# Altium PCB USBC Isolator.PcbDoc
Units mm, origin at the board's own origin, x right, y up, seen from the top; angles counter-clockwise.
Board outline 60 x 39 mm, 4 copper layers (Top Layer, Layer 1, Layer 2, Bottom Layer), stack 1.592 mm thick; 30 components, 18 nets, 132 pads, 60 vias.
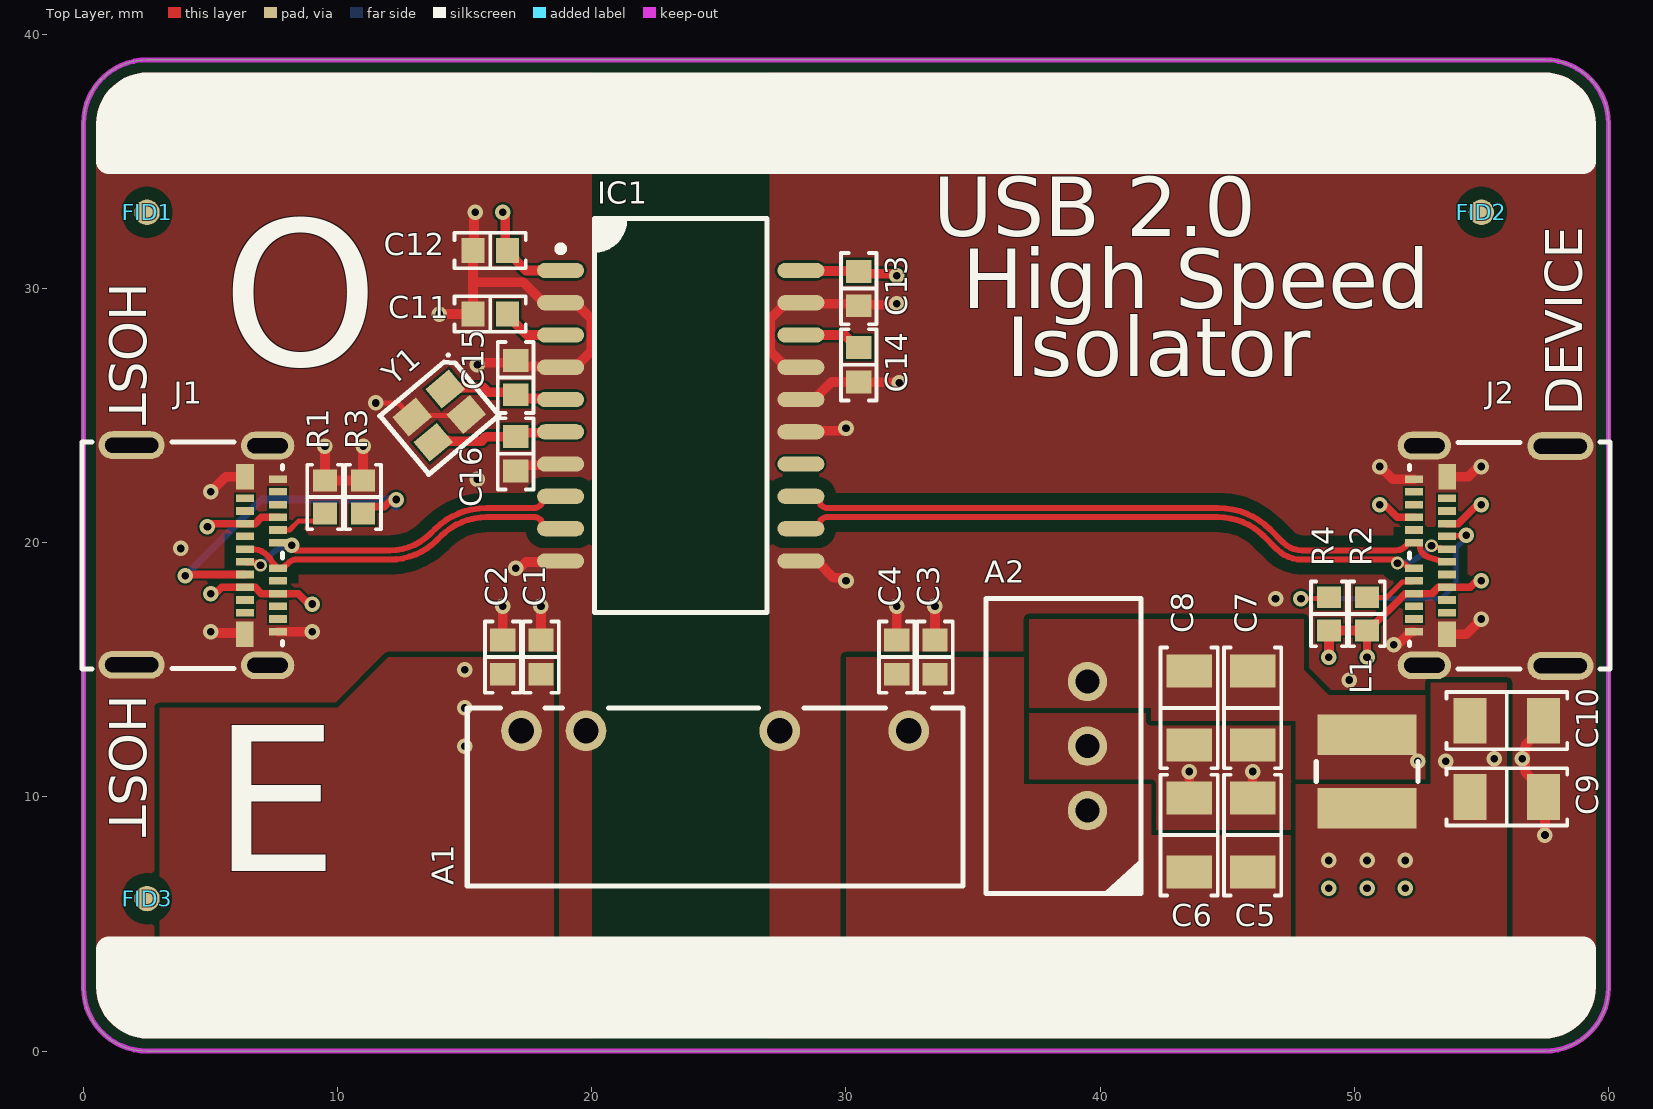
[diagram p0: Top Layer view]
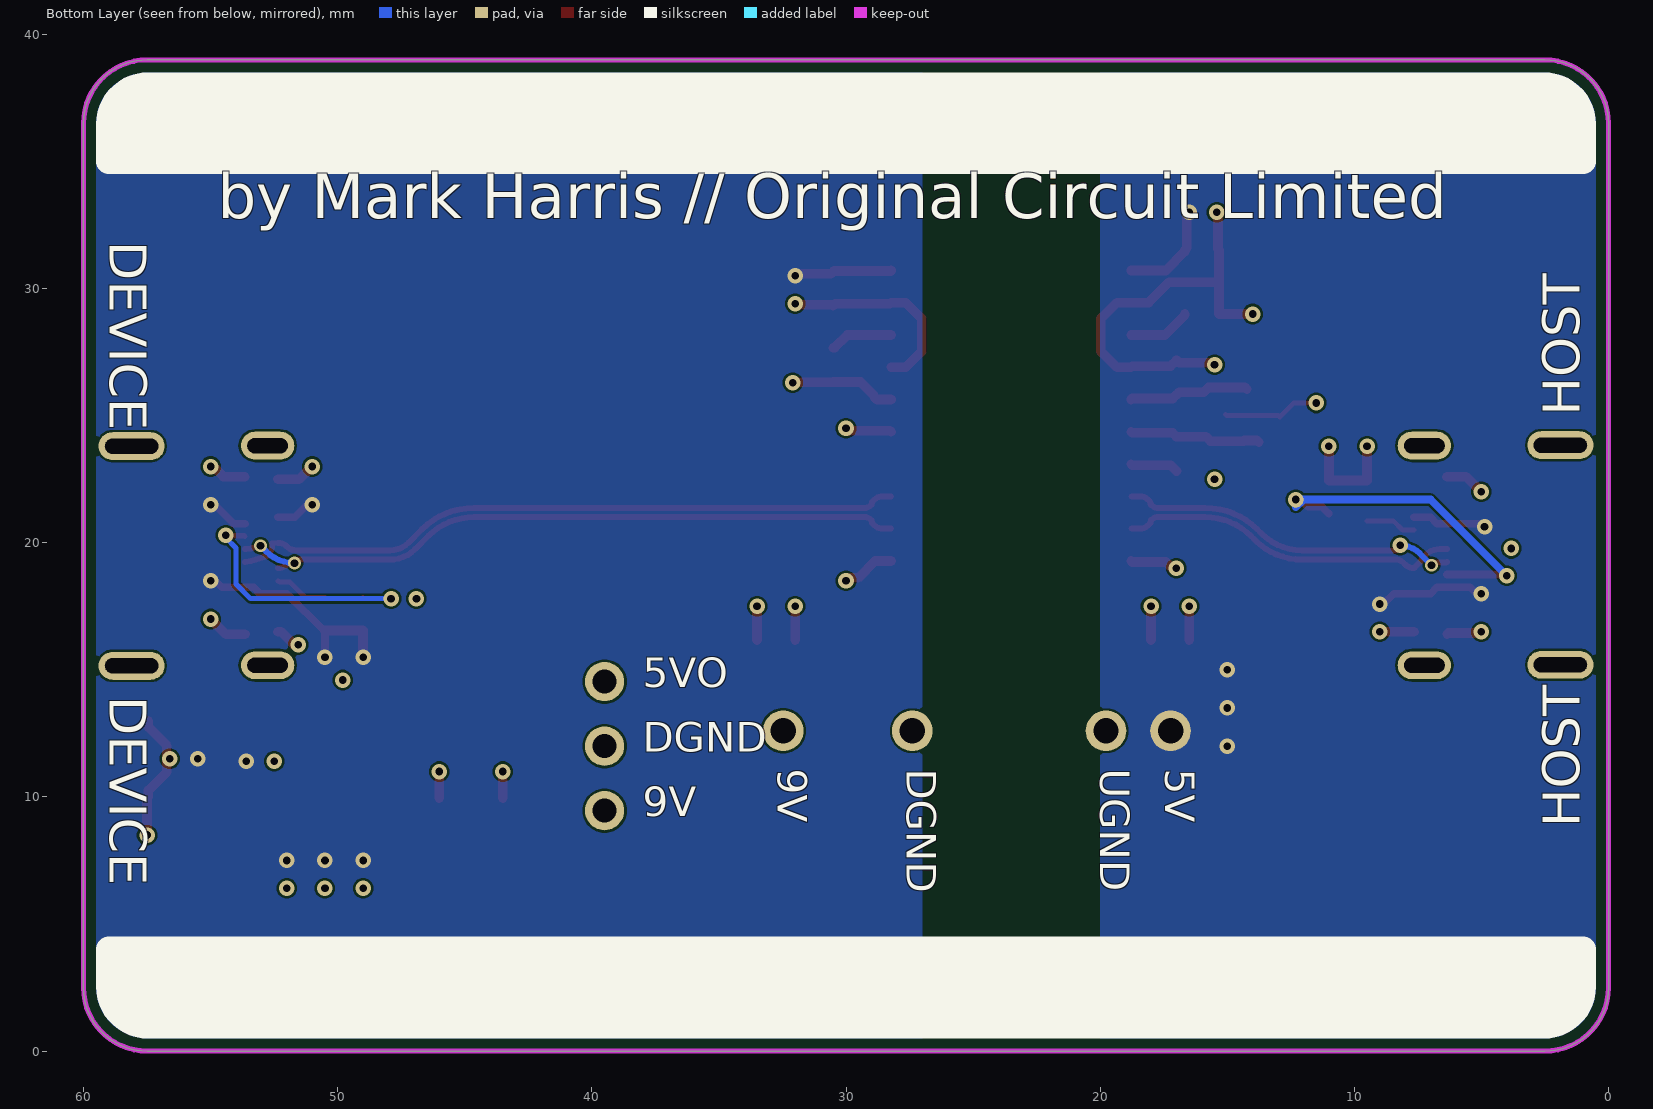
[diagram p1: Bottom Layer view, seen from below]
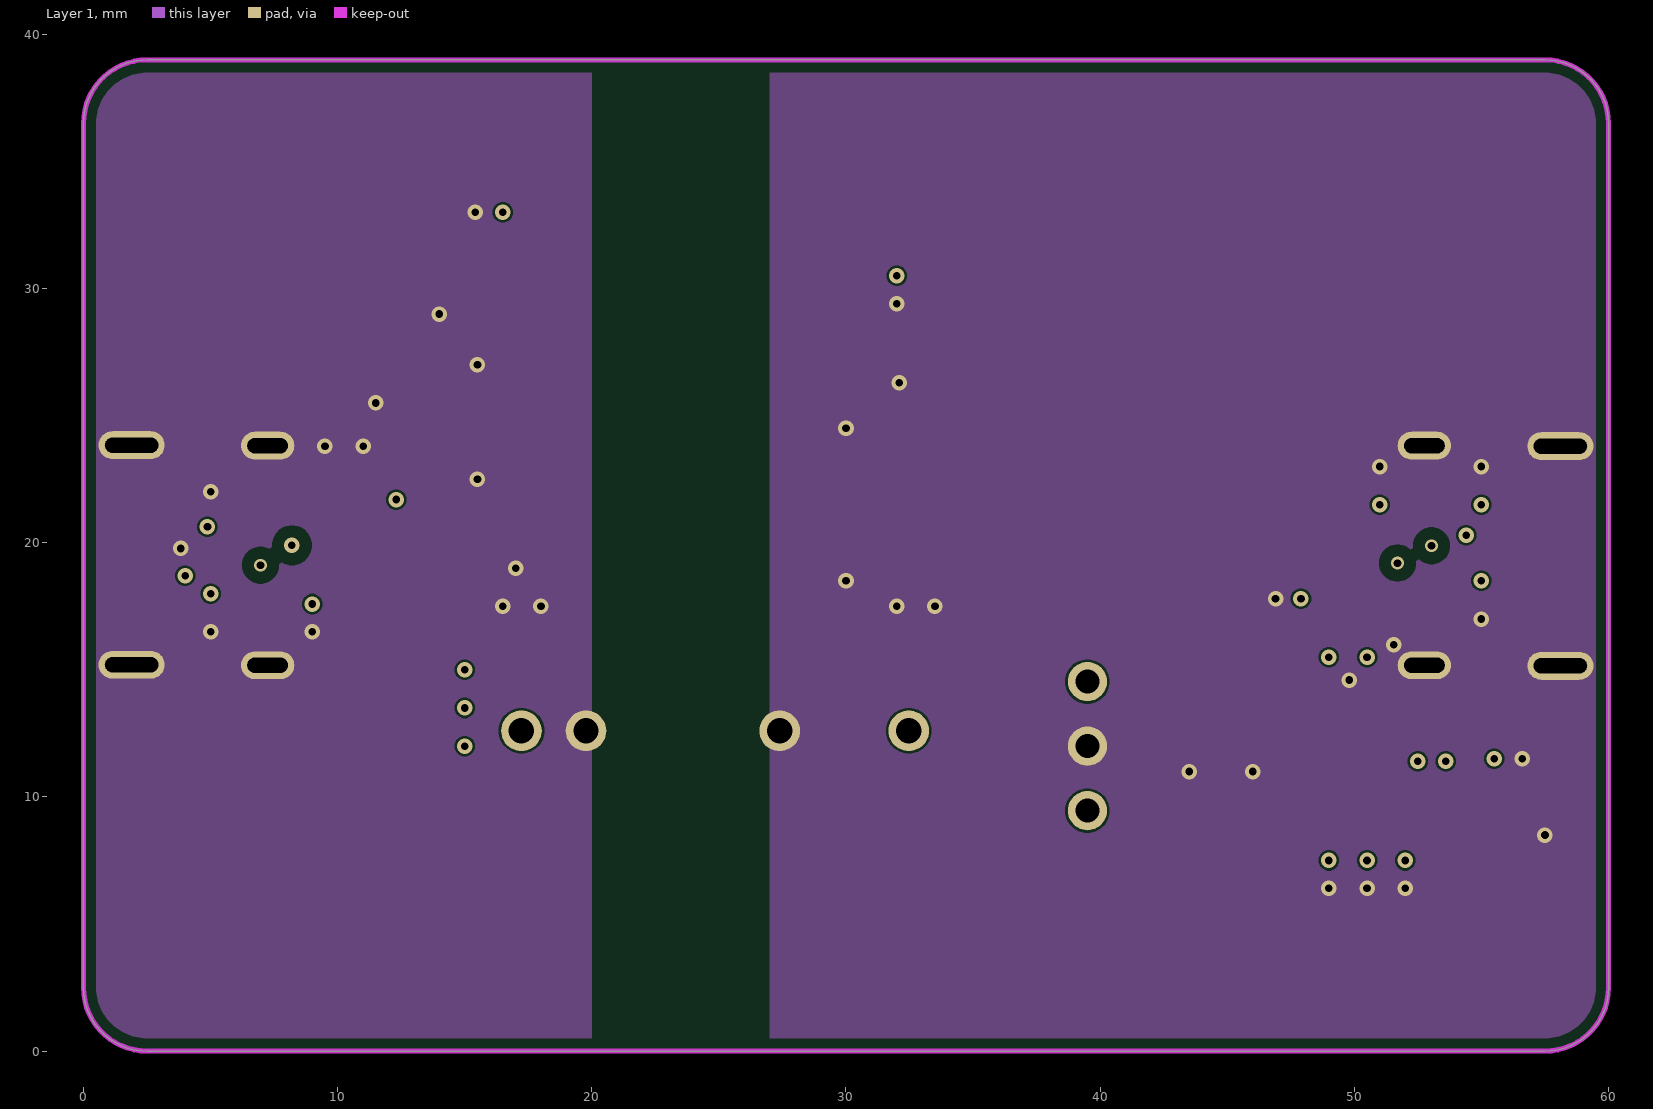
[diagram p2: Layer 1]
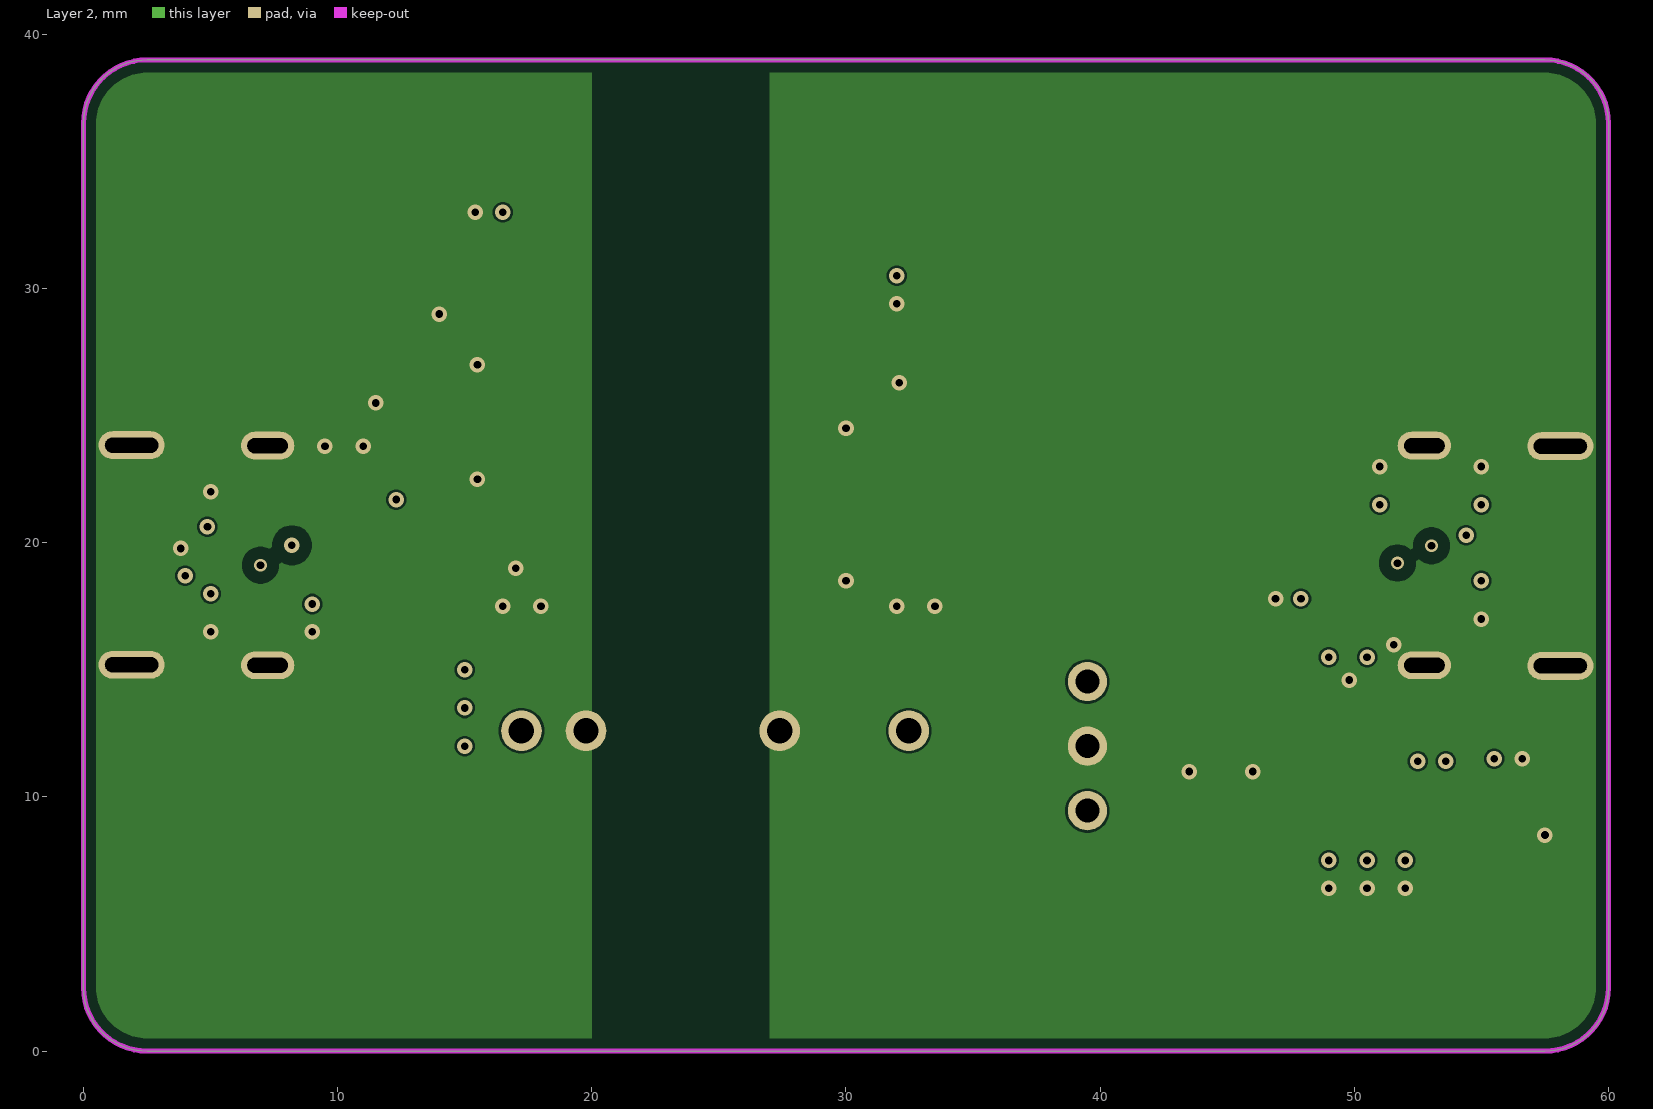
[diagram p3: Layer 2]
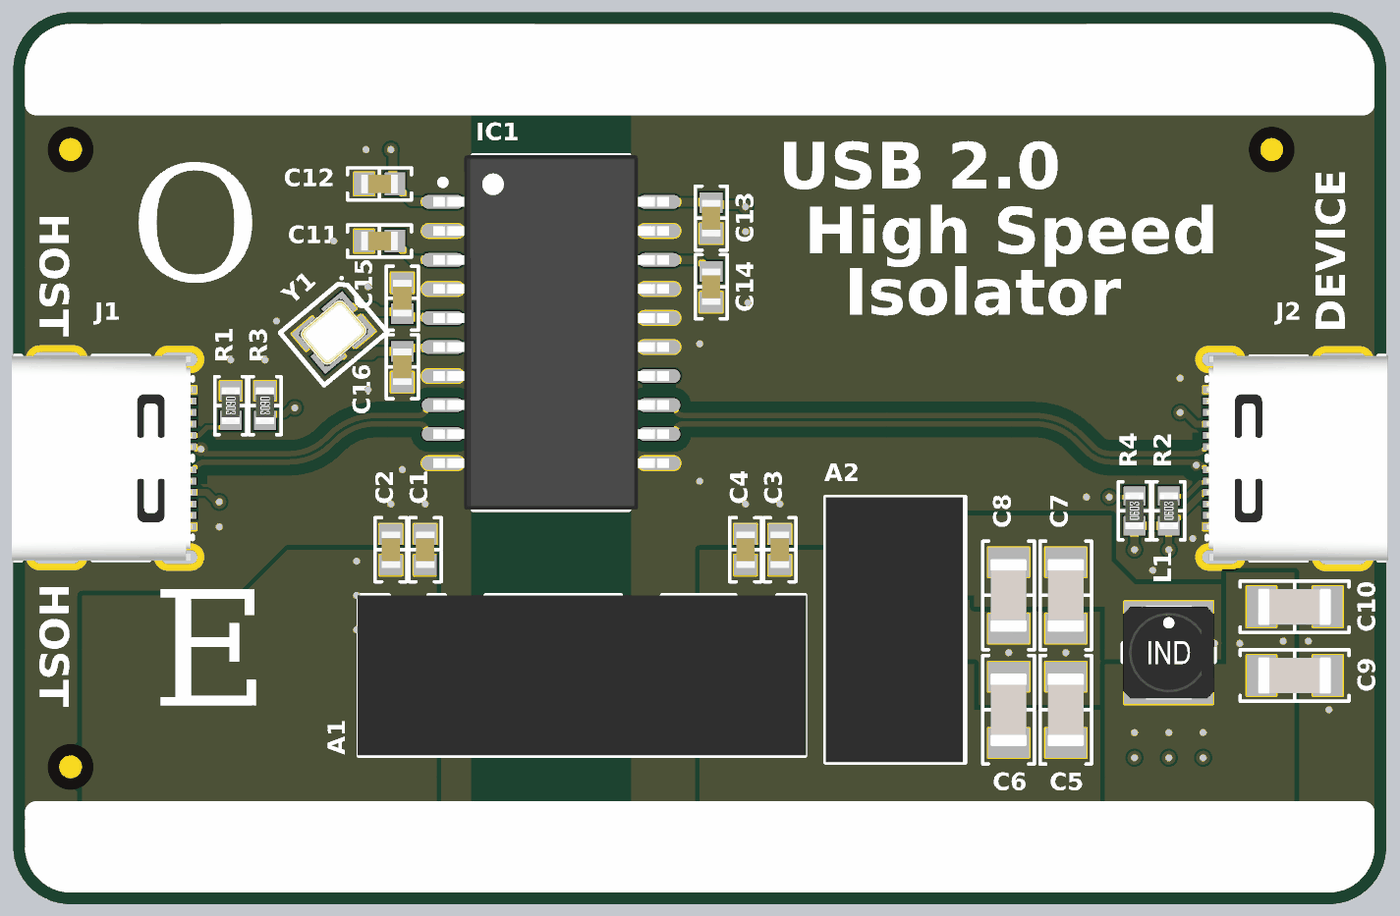
[diagram p4: 3D render of the assembled board from above, using the file's embedded part models]

## Layer stack, top to bottom
Top Solder: solder mask 0.0102, Solder Resist, Dk 3.8
Top Layer: signal copper 0.0356
Dielectric 2: prepreg 0.2104, PP-006, Dk 4.4
Layer 1: signal copper 0.0175
Dielectric 1: dielectric 1.065, FR-4, Dk 4.6
Layer 2: signal copper 0.0175
Dielectric 3: prepreg 0.2104, PP-006, Dk 4.4
Bottom Layer: signal copper 0.0356
Bottom Solder: solder mask 0.0102, Solder Resist, Dk 3.8

## Board outline
2.5,0 cw(c2.5,2.5) 0,2.5 0,36.5 cw(c2.5,36.5) 2.5,39 57.5,39 cw(c57.5,36.5) 60,36.5 60,2.5 cw(c57.5,2.5) 57.5,0

## Design rules (kind name [scope] priority, off if disabled: settings)
BoardOutlineClearance [All] p1: gap=0.5 ignorepadtopadclearanceinfootprint=FALSE
Clearance Clearance_Poly [InPolygon vs InPolygon] p1: gap=0.2 ignorepadtopadclearanceinfootprint=FALSE
Clearance Clearance_USB [InDifferentialPairClass('USB') vs InNet('DGND') OR InNet('UGND')] p2: gap=0.472 ignorepadtopadclearanceinfootprint=FALSE
Clearance [All] p3: gap=0.09 ignorepadtopadclearanceinfootprint=FALSE except(0.2: Arc-THPad Track-THPad SMDPad-THPad; 0.5: THPad-THPad)
ComponentClearance ComponentClearance_VREG [(HasFootprint('GAPTEC 3S7B_3U SINGLE') OR HasFootprint('GAPTEC LCB78_0.5'))] p1: gap=0.5 collisioncheckmode=3 verticalgap=-3 showdistances=TRUE
ComponentClearance [All] p2: gap=0.254 collisioncheckmode=3 verticalgap=0.254 showdistances=TRUE
DiffPairsRouting [InDifferentialPairClass('USB')] p1: maxlimit=0.127 minlimit=0.125 mostfreqgap=0.127 toplayer_maxgap=0.125 toplayer_prefgap=0.125 toplayer_minwidth=0.236 toplayer_maxwidth=0.236 toplayer_prefwidth=0.236 midlayer1_mingap=0.127 midlayer1_minwidth=0.148 midlayer1_maxwidth=0.148 midlayer1_prefwidth=0.148 midlayer2_mingap=0.127 midlayer2_minwidth=0.148 midlayer2_maxwidth=0.148 midlayer2_prefwidth=0.148 bottomlayer_maxgap=0.125 bottomlayer_prefgap=0.125 bottomlayer_minwidth=0.236 bottomlayer_maxwidth=0.236 bottomlayer_prefwidth=0.236 impedanceprofiledriven=TRUE impedanceprofileid={089979F6-FE9B-4256-AC42-D2907E0BB9E0} impedanceprofilevalue=90.000000 maxuncoupledlength=10
MinimumSolderMaskSliver [All] p1: minsoldermaskwidth=0.1
PlaneClearance [All] p1: clearance=0.2
PolygonConnect [All] p1: connectstyle=Direct reliefconductorwidth=0.254 reliefentries=4 polygonreliefangle="90 Angle" airgapwidth=0.254
RoutingVias [All] p1: holewidth=0.3 width=0.6 viastyle="Through Hole" minholewidth=0.15 minwidth=0.45 maxholewidth=6.3 maxwidth=6.6
SilkToSilkClearance [All] p1: silktosilkclearance=-3
SilkToSolderMaskClearance [IsPad] p1: minsilkscreentomaskgap=-3 clearancetoexposedcopper=TRUE
SolderMaskExpansion SolderMaskExpansion_Via [IsVia] p1: expansion=0.102 istentingtop=TRUE
SolderMaskExpansion [All] p2: expansion=0.05 istentingtop=FALSE
Width [All] p1: maxlimit=3 minlimit=0.09 preferedwidth=0.2
24 further rules are at their usual default settings.

## Classes and differential pairs
differential pair class USB: IN_USB OUT_USB
differential pair OUT_USB: +OUT_USB_DP -OUT_USB_DN
differential pair IN_USB: +IN_USB_DP -IN_USB_DN

## Components (designator, comment, footprint, x,y, rotation, side; value= is the part's Value field where it differs from the comment)
A1 "3S7B_0509S3U" "GAPTEC 3S7B_3U SINGLE" 25,10 r0 top
A2 "LCB78_05-0.5" "GAPTEC LCB78_0.5" 38.5,12 r90 top
C1 "1 µF" "CAP 0603_1608" 18,15.5 r270 top
C2 "0.1 µF" "CAP 0603_1608" 16.5,15.5 r270 top
C3 "0.1 µF" "CAP 0603_1608" 33.5,15.5 r270 top
C4 "1 µF" "CAP 0603_1608" 32,15.5 r270 top
C5 "10 µF" "CAP 1206_3216 - 0.8MM" 46,8.5 r270 top
C6 "10 µF" "CAP 1206_3216 - 0.8MM" 43.5,8.5 r270 top
C7 "10 µF" "CAP 1206_3216 - 0.8MM" 46,13.5 r90 top
C8 "10 µF" "CAP 1206_3216 - 0.8MM" 43.5,13.5 r90 top
C9 "10 µF" "CAP 1206_3216 - 0.8MM" 56,10 r180 top
C10 "10 µF" "CAP 1206_3216 - 0.8MM" 56,13 r180 top
C11 "0.1 µF" "CAP 0603_1608" 16,29 r0 top
C12 "0.1 µF" "CAP 0603_1608" 16,31.5 r0 top
C13 "0.1 µF" "CAP 0603_1608" 30.5,30 r90 top
C14 "0.1 µF" "CAP 0603_1608" 30.5,27 r90 top
C15 "8 pF" "CAP 0603_1608" 17,26.5 r270 top
C16 "8 pF" "CAP 0603_1608" 17,23.5 r90 top
FID1 "Fiducial" Fiducial-1mm 2.5,33 r90 top
FID2 "Fiducial" Fiducial-1mm 55,33 r90 top
FID3 "Fiducial" Fiducial-1mm 2.5,6 r90 top
IC1 "ADUM4165BRIZ" "ANALOG SOIC-20 RI-20-1" 23.5,25 r0 top
J1 "1054500101" "Molex 1054500101" 7,19.5 r270 top
J2 "1054500101" "Molex 1054500101" 53,19.5 r90 top
L1 "22 µH" "TDK VLCF4028-2" 50.5,11 r270 top
R1 "5.1 kOhms" "RES 0603_1608" 9.5,21.8 r270 top
R2 "22 kOhms" "RES 0603_1608" 50.5,17.2 r90 top
R3 "5.1 kOhms" "RES 0603_1608" 11,21.8 r270 top
R4 "22 kOhms" "RES 0603_1608" 49,17.2 r90 top
Y1 "24 MHz" "NDK NX2520SA" 14,25 r220 top

## Footprints (in the part's own frame and the unit in brackets; to place one, negate y for a bottom-side part, rotate by r counter-clockwise, add the part's x,y. Pads: shape width x height; smd on the part's side, far side on the other; paste and mask are expansions set on the pad)
"ANALOG SOIC-20 RI-20-1" [mm] "SOIC, 20-Leads, Body 15.41x7.49mm, Pitch 1.27mm, IPC Medium Density"
  oval 1.85x0.6 smd: 1(-4.725,5.715) 2(-4.725,4.445) 3(-4.725,3.175) 4(-4.725,1.905) 5(-4.725,0.635) 6(-4.725,-0.635) 7(-4.725,-1.905) 8(-4.725,-3.175) 9(-4.725,-4.445) 10(-4.725,-5.715) 11(4.725,-5.715) 12(4.725,-4.445) 13(4.725,-3.175) 14(4.725,-1.905) 15(4.725,-0.635) 16(4.725,0.635) 17(4.725,1.905) 18(4.725,3.175) 19(4.725,4.445) 20(4.725,5.715)
  silkscreen extent -4.85,-7.75 3.4,7.75, body extent -5.15,-7.75 5.15,7.75, height 2.64
"CAP 0603_1608" [mm] "Chip Capacitor, 2-Leads, Body 1.60x0.80mm, IPC Medium Density"
  rect 0.9x1 smd: 1(-0.675,0) 2(0.675,0)
  silkscreen extent -1.4,-0.7 1.4,0.7, body extent -0.8,-0.41 0.8,0.41, height 0.82
"CAP 1206_3216 - 0.8MM" [mm] "Chip Capacitor, 2-Leads, Body 3.25x1.60mm, IPC Medium Density"
  rect 1.3x1.8 smd: 1(-1.45,0) 2(1.45,0)
  silkscreen extent -2.37,-1.12 2.37,1.12, body extent -1.6,-0.8 1.6,0.8, height 0.8
Fiducial-1mm [mm]
  round 1 smd paste-1 mask+0.5: F(0,0)
  Top Layer pour cut-out: -1,0 -0.924,0.383 -0.707,0.707 -0.383,0.924 0,1 0,1 0.383,0.924 0.707,0.707 0.924,0.383 1,0 1,0 0.924,-0.383 0.707,-0.707 0.383,-0.924 0,-1 0,-1 -0.383,-0.924 -0.707,-0.707 -0.924,-0.383 -1,0
"GAPTEC 3S7B_3U SINGLE" [mm] "3W Single/Dual Output - Fixed Input - Isolated & Semi-regulated"
  round 1.6 hole 1: 1(-7.77,2.6) 2(-5.23,2.6) 5(2.39,2.6) 7(7.47,2.6)
  silkscreen extent -9.9,-3.5 9.6,3.5, body extent -9.95,-3.5 9.65,3.5, height 10
"GAPTEC LCB78_0.5" [mm] "Wide Input Non-Isolated & Regulated, Single Output"
  round 1.55 hole 0.95: 1(-2.54,-1) 2(0,-1) 3(2.54,-1)
  silkscreen extent -5.8,-3.1 5.8,3, body extent -5.8,-3 5.8,3, height 10.2
"Molex 1054500101" [mm] "USB-C Receptacle Connector 24 Position Surface Mount, 24 Position, Body 8.94x7.90mm"
  rect 0.3x0.7 smd: A1(-3,0.655) A2(-2.5,0.655) A3(-2,0.655) A4(-1.5,0.655) A5(-1,0.655) A6(-0.5,0.655) A7(0.5,0.655) A8(1,0.655) A9(1.5,0.655) A10(2,0.655) A11(2.5,0.655) A12(3,0.655) B2(2.25,-0.645) B3(1.75,-0.645) B4(1.25,-0.645) B5(0.75,-0.645) B6(0.25,-0.645) B7(-0.25,-0.645) B8(-0.75,-0.645) B9(-1.25,-0.645) B10(-1.75,-0.645) B11(-2.25,-0.645)
  rect 1x0.7 smd: B1(3.1,-0.655) B12(-3.1,-0.645)
  oval 1.1x2.6 hole 2.1 slot 0.6 at 0 deg unplated: S(-4.34,-5.105) S(4.3,-5.105)
  oval 1.1x2.1 hole 1.6 slot 0.6 at 0 deg unplated: S(-4.32,0.245) S(4.32,0.245)
  silkscreen extent -4.47,-7.07 4.47,0.83, body extent -4.47,-7.07 4.47,0.83, height 3.21
"NDK NX2520SA" [mm] "Crystal, 4-Leads, Body 2.00x2.50mm, Pitch 1.70mm, IPC Medium Density"
  rect 1.2x1 smd: 1(-0.85,-0.65) 2(0.85,-0.65) 3(0.85,0.65) 4(-0.85,0.65)
  silkscreen extent -1.85,-1.65 1.8,1.5, body extent -1.26,-1.01 1.26,1.01, height 0.5
"RES 0603_1608" [mm] "Chip Resistor, 2-Leads, Body 1.60x0.80mm, IPC Medium Density"
  rect 0.85x0.95 smd: 1(-0.65,0) 2(0.65,0)
  silkscreen extent -1.27,-0.7 1.27,0.7, body extent -0.8,-0.4 0.8,0.4, height 0.45
"TDK VLCF4028-2" [mm] "Precision Wire Wound Inductor, 2-Leads, Body 4.00x4.00mm, IPC Medium Density"
  rect 1.6x3.9 smd: 1(-1.45,0) 2(1.45,0)
  silkscreen extent -0.4,-2 0.4,2, body extent -2.05,-2 2.05,2, height 2.81

## Part data
A1: "DC-DC", Current - Output (Max)=333mA, Manufacturer="GAPTEC Electronic", Operating Temperature="-40°C ~ 85°C", Power (Watts)="3 W", Supplier Part Number 1=3182-3S7B_0509S3U-ND, Voltage - Input (Max)=5.5V, Voltage - Input (Min)=4.5V, Voltage - Isolation="3 kV", Voltage - Output 1=9V, Applications="ITE (Commercial)", ComponentLink1Description=Datasheet, ComponentLink1URL=https://gaptec-electronic.com/datenblaetter/3S7B_3U.pdf, ComponentLink2Description="DigiKey Link", ComponentLink2URL=https://www.digikey.com/en/products/detail/gaptec-electronic/3S7B-0509S3U/13692545, Efficiency=84%, LastUpdated="01/09/2023 20:51:51", Lifecycle Status=Active, Minimum Order=1, Mounting Type="Through Hole", Number of Outputs=1, Packaging=Tube, Part Number=3S7B_0509S3U, Part Status=Active, PartId=72, Price=5.05, Series="3S7B_3U (3W)", Size / Dimension="0.77\" L x 0.28\" W x 0.39\" H (19.6mm x 7.0mm x 10.0mm)", Supplier 1=DigiKey, Type="Isolated Module"
A2: "DC-DC POL", Current - Output (Max)=500mA, Manufacturer="GAPTEC Electronic", Operating Temperature="-40°C ~ 85°C (With Derating)", Power (Watts)="2.5 W", Supplier Part Number 1=3182-LCB78_05-0.5-ND, Voltage - Input (Max)=55V, Voltage - Input (Min)=6.5V, Voltage - Output 1=5V, Applications="ITE (Commercial)", ComponentLink1Description=Datasheet, ComponentLink1URL=https://gaptec-electronic.com/datenblaetter/LCB78_0.5.pdf, ComponentLink2Description="DigiKey Link", ComponentLink2URL=https://www.digikey.com/en/products/detail/gaptec-electronic/LCB78-05-0-5/13691990, Efficiency=95%, LastUpdated="04/09/2023 17:37:46", Lifecycle Status=Active, Minimum Order=1, Mounting Type="Through Hole", Number of Outputs=1, Packaging=Tube, Part Number=LCB78_05-0.5, Part Status=Active, PartId=87, Price=5.66, Series=LCB78_0.5, Size / Dimension="0.46\" L x 0.24\" W x 0.40\" H (11.6mm x 6.0mm x 10.2mm)", Supplier 1=DigiKey, Type="Non-Isolated PoL Module"
C1 C4: library part GCM188R71E105KA64D, "CAP CER 1UF 25V X7R 0603", Device Package="0603 (1608 Metric)", Manufacturer="Murata Electronics", Operating Temperature="-55°C ~ 125°C", Ratings=AEC-Q200, Supplier Part Number 1=490-10673-1-ND, Temperature Coefficient=X7R, Tolerance=±10%, Voltage - Rated=25V, Applications=Automotive, Capacitance="1 µF", ComponentLink1Description=Datasheet, ComponentLink1URL=https://www.murata.com/~/media/webrenewal/support/library/catalog/products/capacitor/mlcc/c03e.ashx?la=en-us, ComponentLink2Description="DigiKey Link", ComponentLink2URL=https://www.digikey.com/en/products/detail/murata-electronics/GCM188R71E105KA64D/4903956, LastUpdated="20/08/2023 19:09:04", Lifecycle Status=Active, Minimum Order=1, Mounting Type="Surface Mount, MLCC", Package / Case="0603 (1608 Metric)", Packaging=TapeAndReel, Part Number=GCM188R71E105KA64D, Part Status=Active, PartId=6762, Price=0.03, Series=GCM, Size / Dimension="0.063\" L x 0.031\" W (1.60mm x 0.80mm)", Supplier 1=DigiKey, Thickness (Max)="0.035\" (0.90mm)"
C2 C3 C11 C12 C13 C14: library part CL10B104KB8NNNC, "CAP CER 0.1UF 50V X7R 0603", Device Package="0603 (1608 Metric)", Manufacturer="Samsung Electro-Mechanics", Operating Temperature="-55°C ~ 125°C", Supplier Part Number 1=1276-1000-1-ND, Temperature Coefficient=X7R, Tolerance=±10%, Voltage - Rated=50V, Applications="General Purpose", Capacitance="0.1 µF", ComponentLink1Description=Datasheet, ComponentLink1URL=http://www.samsungsem.com/kr/support/product-search/mlcc/CL10B104KB8NNNC.jsp, ComponentLink2Description="DigiKey Link", ComponentLink2URL=https://www.digikey.com/en/products/detail/samsung-electro-mechanics/CL10B104KB8NNNC/3886658, LastUpdated="20/08/2023 19:09:00", Lifecycle Status=Active, Minimum Order=1, Mounting Type="Surface Mount, MLCC", Package / Case="0603 (1608 Metric)", Packaging=TapeAndReel, Part Number=CL10B104KB8NNNC, Part Status=Active, PartId=9788, Price=0.01, Series=CL, Size / Dimension="0.063\" L x 0.031\" W (1.60mm x 0.80mm)", Supplier 1=DigiKey, Thickness (Max)="0.035\" (0.90mm)"
C5 C6 C7 C8 C9 C10: library part CL31B106KAHNNNE, "CAP CER 10UF 25V X7R 1206", Device Package="1206 (3216 Metric)", Manufacturer="Samsung Electro-Mechanics", Operating Temperature="-55°C ~ 125°C", Supplier Part Number 1=1276-1804-1-ND, Temperature Coefficient=X7R, Tolerance=±10%, Voltage - Rated=25V, Applications="General Purpose", Capacitance="10 µF", ComponentLink1Description=Datasheet, ComponentLink1URL=http://www.samsungsem.com/kr/support/product-search/mlcc/CL31B106KAHNNNE.jsp, ComponentLink2Description="DigiKey Link", ComponentLink2URL=https://www.digikey.com/en/products/detail/samsung-electro-mechanics/CL31B106KAHNNNE/3887462, LastUpdated="03/09/2023 19:14:37", Lifecycle Status=Active, Minimum Order=1, Mounting Type="Surface Mount, MLCC", Package / Case="1206 (3216 Metric)", Packaging=TapeAndReel, Part Number=CL31B106KAHNNNE, Part Status=Active, PartId=40754, Price=0.03, Series=CL, Size / Dimension="0.126\" L x 0.063\" W (3.20mm x 1.60mm)", Supplier 1=DigiKey, Thickness (Max)="0.071\" (1.80mm)"
C15 C16: library part CGA3E2C0G1H080D080AA, "CAP CER 8PF 50V C0G 0603", Device Package="0603 (1608 Metric)", Manufacturer="TDK Corporation", Operating Temperature="-55°C ~ 125°C", Ratings=AEC-Q200, Supplier Part Number 1=445-5626-1-ND, Temperature Coefficient="C0G, NP0", Tolerance=±0.5pF, Voltage - Rated=50V, Applications=Automotive, Capacitance="8 pF", ComponentLink1Description=Datasheet, ComponentLink1URL=https://product.tdk.com/info/en/catalog/datasheets/mlcc_automotive_general_en.pdf?ref_disty=digikey, ComponentLink2Description="DigiKey Link", ComponentLink2URL=https://www.digikey.com/en/products/detail/tdk-corporation/CGA3E2C0G1H080D080AA/2443104, LastUpdated="02/09/2023 19:08:31", Lifecycle Status=Active, Minimum Order=1, Mounting Type="Surface Mount, MLCC", Package / Case="0603 (1608 Metric)", Packaging=TapeAndReel, Part Number=CGA3E2C0G1H080D080AA, Part Status=Active, PartId=15270, Price=0.02, Series=CGA, Size / Dimension="0.063\" L x 0.031\" W (1.60mm x 0.80mm)", Supplier 1=DigiKey, Thickness (Max)="0.035\" (0.90mm)"
IC1: "5KV 480MBPS USB DIG ISOLATOR HOS", Isolated Power=Yes, Manufacturer="Analog Devices Inc.", Operating Temperature="-55°C ~ 125°C", Supplier Device Package=20-SOIC-IC, Supplier Part Number 1=505-ADUM4165BRIZ-ND, Voltage - Isolation=5700Vrms, Voltage - Supply="3V ~ 3.6V, 3V ~ 5.5V", Channel Type=Unidirectional, Common Mode Transient Immunity (Min)=40kV/µs, ComponentLink1Description=Datasheet, ComponentLink1URL=https://www.analog.com/media/en/technical-documentation/data-sheets/adum4165-4166.pdf, ComponentLink2Description="DigiKey Link", ComponentLink2URL=https://www.digikey.com/en/products/detail/analog-devices-inc/ADUM4165BRIZ/16285968, Data Rate=480Mbps, Inputs - Side 1/Side 2=1/0, LastUpdated="01/09/2023 12:37:38", Lifecycle Status=Active, Minimum Order=1, Mounting Type="Surface Mount", Number of Channels=1, Packaging=Tube, Part Number=ADUM4165BRIZ, PartId=49, Price=9.56, Propagation Delay tpLH / tpHL (Max)="650ns, 600ns", Rise / Fall Time (Typ)="300ns, 350ns (Max)", Series=-, Supplier 1=DigiKey, Technology="Magnetic Coupling", Type="RS232, USB"
J1 J2: "CONN RCP USB3.1 TYPEC 24P SMD RA", Current Rating (Amps)="0.25A, 1A, 5A", Manufacturer=Molex, Operating Temperature="-30°C ~ 85°C", Supplier Part Number 1=WM12856CT-ND, Voltage - Rated=30VAC/DC, ComponentLink1Description=Datasheet, ComponentLink1URL=https://www.molex.com/pdm_docs/ps/PS-105448-001.pdf, ComponentLink2Description="DigiKey Link", ComponentLink2URL=http://digikey.com/product-detail/en/molex/1054500101/WM12856CT-ND/5843891, Connector Type="USB - C (Type - C)", Gender=Receptacle, LastUpdated="06/06/2020 02:14:04", Lifecycle Status=Active, Mating Cycles=10000, Minimum Order=1, Mounting Feature=Horizontal, Mounting Type="Surface Mount, Right Angle; Through Hole", Number of Contacts=24, Number of Ports=1, Packaging=TapeAndReel, Part Number=1054500101, Part Status=Active, Price=1.22, Series=105445, Shielding=Shielded, Specifications="USB 3.1 (USB 3.1 Gen 2, Superspeed+)", Supplier 1=DigiKey, Termination=Solder
L1: library part VLCF5028T-220MR71-2, "FIXED IND 22UH 710MA 140MOHM SMD", Current - Saturation=710mA, Current Rating (Amps)="710 mA", DC Resistance (DCR)="140mOhm Max", Device Package=Nonstandard, Inductance Frequency - Test="100 kHz", Manufacturer="TDK Corporation", Operating Temperature="-40°C ~ 105°C", Supplier Part Number 1=445-6559-1-ND, Tolerance=±20%, ComponentLink1Description=Datasheet, ComponentLink1URL=https://product.tdk.com/info/en/catalog/datasheets/inductor_commercial_power_vlcf5028-2_en.pdf?ref_disty=digikey, ComponentLink2Description="DigiKey Link", ComponentLink2URL=https://www.digikey.com/en/products/detail/tdk-corporation/VLCF5028T-220MR71-2/2465316, Height - Seated (Max)="0.110\" (2.80mm)", Inductance="22 µH", LastUpdated="12/09/2023 20:23:17", Lifecycle Status=Active, Material - Core=Ferrite, Minimum Order=1, Mounting Type="Surface Mount", Package / Case=Nonstandard, Packaging=TapeAndReel, Part Number=VLCF5028T-220MR71-2, Part Status=Active, PartId=188, Price=0.49, Series=VLCF, Shielding=Shielded, Size / Dimension="0.197\" L x 0.197\" W (5.00mm x 5.00mm)", Supplier 1=DigiKey, Type="Drum Core, Wirewound"
R1 R3: library part RK73H1JTTD5101F, "RES 5.1K OHM 1% 1/10W 0603", Device Package="0603 (1608 Metric)", Manufacturer="KOA Speer Electronics, Inc.", Operating Temperature="-55°C ~ 155°C", Power (Watts)="0.1W, 1/10W", Ratings=AEC-Q200, Supplier Device Package=0603, Supplier Part Number 1=2019-RK73H1JTTD5101FCT-ND, Temperature Coefficient=±100ppm/°C, Tolerance=±1%, ComponentLink1Description=Datasheet, ComponentLink1URL=http://www.koaspeer.com/catimages/Products/RK73H/RK73H.pdf, ComponentLink2Description="DigiKey Link", ComponentLink2URL=https://www.digikey.com/en/products/detail/koa-speer-electronics-inc/RK73H1JTTD5101F/9844897, Composition="Thick Film", Features="Automotive AEC-Q200, Moisture Resistant", Height - Seated (Max)="0.022\" (0.55mm)", LastUpdated="01/09/2023 19:37:13", Lifecycle Status=Active, Minimum Order=1, Number of Terminations=2, Package / Case="0603 (1608 Metric)", Packaging=CutTape, Part Number=RK73H1JTTD5101F, Part Status=Active, PartId=22947, Price=0.01, Resistance="5.1 kOhms", Series=RK73H, Size / Dimension="0.063\" L x 0.031\" W (1.60mm x 0.80mm)", Supplier 1=DigiKey
R2 R4: library part RC0603FR-1322KL, "RES 22K OHM 1% 1/10W 0603", Device Package="0603 (1608 Metric)", Manufacturer=Yageo, Operating Temperature="-55°C ~ 155°C", Power (Watts)="0.1W, 1/10W", Supplier Device Package=0603, Supplier Part Number 1=13-RC0603FR-1322KLCT-ND, Temperature Coefficient=±100ppm/°C, Tolerance=±1%, ComponentLink1Description=Datasheet, ComponentLink1URL=https://www.yageo.com/upload/media/product/productsearch/datasheet/rchip/PYu-RC_Group_51_RoHS_L_11.pdf, ComponentLink2Description="DigiKey Link", ComponentLink2URL=https://www.digikey.com/en/products/detail/yageo/RC0603FR-1322KL/13694068, Composition="Thick Film", Features="Moisture Resistant", Height - Seated (Max)="0.022\" (0.55mm)", LastUpdated="01/09/2023 19:36:07", Lifecycle Status=Active, Minimum Order=1, Number of Terminations=2, Package / Case="0603 (1608 Metric)", Packaging=CutTape, Part Number=RC0603FR-1322KL, Part Status=Active, PartId=65454, Price=0.01, Resistance="22 kOhms", Series=RC_L, Size / Dimension="0.063\" L x 0.031\" W (1.60mm x 0.80mm)", Supplier 1=DigiKey
Y1: library part NX2520SA-24MHZ-EXS00A-CS11339, "CRYSTAL 24.0000MHZ 8PF SMD", ESR (Equivalent Series Resistance)="60 Ohms", Frequency Stability=±10ppm, Load Capacitance=8pF, Manufacturer="NDK America, Inc.", Operating Mode=Fundamental, Operating Temperature="-20°C ~ 70°C", Package / Case="4-SMD, No Lead", Supplier Part Number 1=644-1326-1-ND, ComponentLink1Description=Datasheet, ComponentLink1URL=//media.digikey.com/pdf/Data%20Sheets/NDK%20PDFs/NX2520SA-24MHz-EXS00A-CS11339.pdf, ComponentLink2Description="DigiKey Link", ComponentLink2URL=https://www.digikey.com/en/products/detail/ndk-america-inc/NX2520SA-24MHZ-EXS00A-CS11339/8275431, Frequency="24 MHz", Frequency Tolerance=±10ppm, Height - Seated (Max)="0.022\" (0.55mm)", LastUpdated="01/09/2023 20:30:12", Lifecycle Status=Active, Minimum Order=1, Mounting Type="Surface Mount", Packaging=TapeAndReel, Part Number=NX2520SA-24MHZ-EXS00A-CS11339, Part Status=Active, PartId=520, Price=0.71, Series=NX2520SA, Size / Dimension="0.098\" L x 0.079\" W (2.50mm x 2.00mm)", Supplier 1=DigiKey, Type="MHz Crystal"

## Via types
v1: diameter 0.61, hole 0.3, Top Layer to Bottom Layer, tented both sides, 57 vias
v2: diameter 0.5, hole 0.3, Top Layer to Bottom Layer, tented both sides, 3 vias

## Nets (pads, with @x,y where several pads share a name; then routed paths per layer and width w, separated by ;. In a path a pad name is that pad's centre, name@x,y a point inside that pad or via, vN(x,y) a via of type N, cw(c..) or ccw(c..) an arc to the next point about the centre after c; other vN are vias at no path point)
5VO: A2.3 C7.2 C8.2 L1.1
  other v1: 52.5,11.4
9V: A1.7 A2.1 C3.2 C4.2 C5.2 C6.2
D5V: C9.2 C10.2 C13.2 IC1.20 J2.A4 J2.A9 J2.B4 J2.B9 L1.2 R2.1 R4.1 | length 16
  Top Layer w0.3: v1(50.5,15.5) R2.1 50.55,16.55 52,18 J2.A4 53.056,18 53.306,18.25 J2.B9 54.561,18.25 54.811,18.5 v1(55,18.5) ; v1(51,21.5) 51.189,21.5 51.689,21 J2.A9 ; J2.B4 54.086,20.75 54.836,21.5 v1(55,21.5)
  Top Layer w0.381: IC1.20 28.245,30.695 30.48,30.695 30.588,30.588 31.912,30.588 v1(32,30.5) ; v1(49,15.5) R4.1 R2.1
  other v1: 49,7.5 50.5,7.5 52,7.5 53.6,11.4 55.5,11.5
DGND: A1.5 A2.2 C3.1 C4.1 C5.1 C6.1 C7.1 C8.1 C9.1 C10.1 C13.1 C14.1 IC1.11 IC1.15 IC1.16 IC1.17 IC1.19 J2.A1 J2.A12 J2.B1 J2.B12 J2.S | length 31.8
  Top Layer w0.381: IC1.11 28.85,19.285 29.517,18.618 29.882,18.618 v1(30,18.5) ; IC1.15 28.267,24.407 29.907,24.407 v1(30,24.5) ; IC1.16 28.791,25.635 28.892,25.736 28.892,25.788 29.428,26.325 C14.1 30.512,26.313 32.087,26.313 v1(32.1,26.3) ; IC1.17 27.659,26.905 27.019,27.545 27.019,28.805 27.659,29.445 IC1.19 28.267,29.403 30.422,29.403 C13.1 30.542,29.368 31.958,29.368 v1(32,29.41) ; C4.1 v1(32,17.5) ; C3.1 v1(33.5,17.5) ; C6.1 v1(43.5,11) ; C5.1 v1(46,11) ; v1(51,23) 51.009,23 51.509,22.5 J2.A12 ; v1(51.549,15.988) 51.714,15.988 52.226,16.5 J2.A1 ; J2.B12 54.4,16.4 v1(55,17) ; J2.B1 54.491,22.6 54.891,23 v1(55,23) ; C10.1 57.45,12.75 56.718,12.018 56.718,11.618 v1(56.6,11.5) 56.718,11.382 56.718,10.982 57.45,10.25 C9.1 57.5,9.95 v1(57.5,8.5)
  other v1: 49,6.4 50.5,6.4 52,6.4 49.8,14.6 46.9,17.8
IN_USB_DN: IC1.9 J1.A7 J1.B7 | length 13.5
  Top Layer w0.236: J1.B7 6.648,19.75 cw(c6.648,18.943) 6.872,19.718 cw(c6.648,18.943) 7.218,19.514 ; 7.219,19.514 7.289,19.443 ; 7.29,19.442 cw(c6.965,19.119) 7.39,19.291 ccw(c7.608,19.381) 7.423,19.234 ccw(c7.608,19.381) 7.441,19.214 7.623,19.032 J1.A7 ccw(c7.655,19.483) 7.996,19.141 8.048,19.193 cw(c8.4,18.84) 8.4,19.339 12.063,19.339 ccw(c12.063,21.935) 13.899,20.099 14.065,20.265 cw(c15.861,18.469) 15.861,21.009 17.718,21.009 cw(c17.718,20.633) 17.984,20.899 cw(c17.916,20.831) 18.013,20.831 ccw(c18.11,20.831) 18.041,20.762 18.131,20.673 ccw(c18.415,20.957) 18.415,20.555 IC1.9
IN_USB_DP: IC1.8 J1.A6 J1.B6 | length 13.2
  Top Layer w0.236: J1.B6 6.387,19.218 6.795,19.218 6.894,19.119 v2(6.965,19.119) ; v1@8.367,19.7 12.062,19.7 ccw(c12.062,21.938) 13.644,20.356 13.811,20.522 cw(c15.86,18.473) 15.86,21.371 17.718,21.371 ccw(c17.718,21.747) 17.984,21.481 ccw(c17.916,21.549) 18.013,21.549 cw(c18.11,21.549) 18.041,21.618 18.131,21.707 cw(c18.415,21.423) 18.415,21.825 IC1.8
  Bottom Layer w0.236: v2(6.965,19.119) 7.425,19.579 cw(c8.2,18.804) 7.871,19.85 cw(c8.2,18.804) v1(8.2,19.9)
NetJ1_A5: J1.A5 R1.2 | length 2
  Top Layer w0.2: J1.A5 8.103,20.5 8.453,20.85 R1.2@9.5,20.85
NetJ1_B5: J1.B5 R3.2 | length 13.6
  Top Layer w0.3: v1(4,18.7) 4.05,18.75 J1.B5 ; R3.2 11.275,21.425 11.836,21.425 12.111,21.7 v1(12.3,21.7)
  Bottom Layer w0.3: v1(4,18.7) 7,21.7 12,21.7 v1@12.3,21.4
NetJ2_A5: J2.A5 R2.2 | length 2.1
  Top Layer w0.2: R2.2 51.275,17.85 51.875,18.45 52.295,18.45 J2.A5
NetJ2_B5: J2.B5 R4.2 | length 10.3
  Top Layer w0.2: v1(47.9,17.8) 48.95,17.8 R4.2 ; J2.B5 53.67,20.275 54.375,20.275 v1(54.4,20.3)
  Bottom Layer w0.2: v1(47.9,17.8) 53.426,17.8 54,18.374 54,19.793 54.4,20.193 v1(54.4,20.3)
OUT_USB_DN: IC1.13 J2.A7 J2.B7 | length 26.6
  Top Layer w0.236: IC1.13 28.585,21.825 cw(c28.585,21.423) 28.869,21.707 28.959,21.618 cw(c28.89,21.549) 28.987,21.549 ccw(c29.084,21.549) 29.016,21.481 ccw(c29.282,21.747) 29.282,21.371 44.64,21.371 cw(c44.64,18.472) 46.689,20.522 47.206,20.006 ccw(c47.943,20.743) 47.943,19.7 51.633,19.7 ccw(c51.633,20.212) 51.995,19.85 52.004,19.859 cw(c52.345,19.517) J2.A7 52.577,19.968 52.577,19.881 ccw(c53.035,19.881) 52.898,19.444 53.413,19.282 J2.B7
OUT_USB_DP: IC1.12 J2.A6 J2.B6 | length 26.7
  Top Layer w0.236: IC1.12 28.585,20.555 ccw(c28.585,20.957) 28.869,20.673 28.959,20.762 ccw(c28.89,20.831) 28.987,20.831 cw(c29.084,20.831) 29.016,20.899 cw(c29.282,20.633) 29.282,21.009 44.639,21.009 cw(c44.639,18.469) 46.435,20.265 46.951,19.749 ccw(c47.942,20.739) 47.942,19.339 v2@51.6,19.339 ; 51.952,19.193 52.004,19.141 ccw(c52.345,19.483) J2.A6 ; v2(53.035,19.881) 53.363,19.785 ccw(c53.604,20.604) 53.413,19.771 53.604,19.75 J2.B6
  Bottom Layer w0.236: v2(51.7,19.2) ccw(c51.7,20.779) 52.817,19.663 v2(53.035,19.881)
U5V: A1.1 C1.2 C2.2 C12.2 IC1.1 J1.A4 J1.A9 J1.B4 J1.B9 | length 11.3
  Top Layer w0.3: v1(4.877,20.623) 5.003,20.75 J1.B9 6.75,20.75 7,21 J1.A4 ; v1(5,18) 5.189,18 5.439,18.25 J1.B4 6.75,18.25 7,18 J1.A9 8.455,18 8.865,17.59 v1(9,17.59)
  Top Layer w0.381: v1(16.5,33) 16.588,32.912 16.588,31.587 C12.2 16.675,31.45 17.41,30.715 IC1.1
  other v1: 15,12 15,13.5 15,15
UGND: A1.2 C1.1 C2.1 C11.1 C12.1 C15.1 C16.1 IC1.2 IC1.4 IC1.7 IC1.10 J1.A1 J1.A12 J1.B1 J1.B12 J1.S R1.1 R3.1 Y1.2 Y1.4 | length 35.4
  Top Layer w0.2: v1(11.5,25.5) 12.383,25.5 Y1.2 12.979,25 15.021,25 Y1.4
  Top Layer w0.381: v1(5,16.5) 5.05,16.45 6.295,16.45 J1.B1 ; v1(5,22) 5.6,22.6 J1.B12 ; J1.A12 v1(9,16.5) ; v1(9.5,23.8) R1.1 R3.1 v1@11,23.592 ; v1(14,29) C11.1 15.325,30.25 ; v1(15.41,33) 15.368,32.958 15.368,31.543 C12.1 15.325,30.25 ; v1(15.5,27) 15.587,27.087 16.912,27.087 C15.1 17.228,26.947 18.733,26.947 IC1.4 19.341,26.905 19.98,27.545 19.98,28.805 19.341,29.445 IC1.2 18.091,29.445 17.286,30.25 15.325,30.25 ; C2.1 v1(16.5,17.5) ; v1(17,19) 17.167,19 17.411,19.243 18.733,19.243 IC1.10 ; C16.1 17.228,23.053 18.733,23.053 IC1.7 ; C1.1 v1(18,17.5)
  other v1: 3.821,19.775 15.5,22.5 11,23.8
VDD1: C11.2 IC1.3 | length 2.5
  Top Layer w0.381: C11.2 16.675,28.95 17.45,28.175 IC1.3
VDD2: C14.2 IC1.18 | length 2.5
  Top Layer w0.381: IC1.18 29.95,28.175 30.45,27.675 C14.2
XI: C15.2 IC1.5 Y1.1 | length 4.8
  Top Layer w0.381: Y1.1 14.298,26.109 15.736,26.109 15.928,25.917 16.908,25.917 C15.2 17.148,25.677 18.733,25.677 IC1.5
XO: C16.2 IC1.6 Y1.3 | length 5.2
  Top Layer w0.381: Y1.3 13.831,24.02 14.34,24.02 14.361,23.999 15.665,23.999 15.84,24.175 C16.2 17.148,24.323 18.733,24.323 IC1.6
pads on no net: FID1.F FID2.F FID3.F IC1.14 J1.A2 J1.A3 J1.A8 J1.A10 J1.A11 J1.B2 J1.B3 J1.B8 J1.B10 J1.B11 J2.A2 J2.A3 J2.A8 J2.A10 J2.A11 J2.B2 J2.B3 J2.B8 J2.B10 J2.B11

## Polygon pours and split planes (outlines as drawn)
UGND on Layer 2 "UGND_L03_P004" (solid, remove dead copper, pour order 4): 0.5,38.5 20,38.5 20,0.5 0.5,0.5
DGND on Layer 2 "DGND_L03_P000" (solid, remove dead copper, pour order 0): 27,38.5 27,0.5 59.5,0.5 59.5,38.5
U5V on Bottom Layer "U5V_L04_P002" (solid, remove dead copper, pour order 2): 0.5,38.5 20,38.5 20,0.5 0.5,0.5
D5V on Bottom Layer "D5V_L04_P001" (solid, remove dead copper, pour order 1): 27,0.5 59.5,0.5 59.5,38.5 27,38.5
DGND on Layer 1 "DGND_L02_P005" (solid, remove dead copper, pour order 5): 27,38.5 27,0.5 59.5,0.5 59.5,38.5
UGND on Layer 1 "UGND_L02_P003" (solid, remove dead copper, pour order 3): 0.5,0.5 0.5,38.5 20,38.5 20,0.5
UGND on Top Layer "UGND_L01_P011" (solid, remove dead copper, pour order 11): 0.5,38.5 0.5,0.5 20,0.5 20,38.5
DGND on Top Layer "DGND_L01_P010" (solid, remove dead copper, pour order 10): 27,38.5 27,0.5 59.5,0.5 59.5,38.5
U5V on Top Layer "g" (solid, remove dead copper, pour order 9): 18.5,15.5 18.5,4.5 3,4.5 3,13.5 10,13.5 12,15.5
D5V on Top Layer "D5V_L01_P008" (solid, remove dead copper, pour order 8): 47.7,10.5 53,10.5 53,14.5 56,14.5 56,4 47.7,4
5VO on Top Layer "5VO_L01_P007" (solid, remove dead copper, pour order 7): 37.2,13.5 37.2,17 48,17 48,15 49,14 52.8,14 52.8,10.6 47.7,10.6 47.7,13 42,13 42,13.5
9V on Top Layer "9V_L01_P006" (solid, remove dead copper, pour order 6): 30,15.5 30,4.5 47.5,4.5 47.5,8.5 42,8.5 42,10.5 37,10.5 37,15.5

## Keep-outs
Keep-Out Layer:
  the board outline again, w0.2

## Silkscreen, mask and mechanical layers (free items; w line width, h text height)
Top Overlay:
  region: 0.5,35 0.5,36.468 cw(c2.532,36.468) 2.532,38.5 57.468,38.5 cw(c57.468,36.468) 59.5,36.468 59.5,35
  region: 0.5,4 0.5,2.532 ccw(c2.532,2.532) 2.532,0.5 57.468,0.5 ccw(c57.468,2.532) 59.5,2.532 59.5,4
  lines w1: 1,4 59,4 ; 1,35 59,35
  text "USB 2.0" at 33.43,31.292 h4
  text "HOST" at 0.527,30.224 h2.5 r270
  text "High Speed" at 34.569,28.457 h4
  text "Isolator" at 36.304,25.782 h4
  text "O" at 5.438,25.085 h10
  text "DEVICE" at 59.467,25 h2.5 r90
  text "HOST" at 0.527,14.024 h2.5 r270
  text "E" at 5.073,5.17 h10
Bottom Overlay:
  region: 0.5,35 0.5,36.468 cw(c2.532,36.468) 2.532,38.5 57.468,38.5 cw(c57.468,36.468) 59.5,36.468 59.5,35
  region: 0.5,4 0.5,2.532 ccw(c2.532,2.532) 2.532,0.5 57.468,0.5 ccw(c57.468,2.532) 59.5,2.532 59.5,4
  lines w1: 1,4 59,4 ; 1,35 59,35
  text "by Mark Harris // Original Circuit Limited" at 54.72,32.201 h3
  text "DEVICE" at 59.467,31.86 h2.5 r90
  text "HOST" at 0.633,25 h2.5 r270
  text "DEVICE" at 59.467,13.96 h2.5 r90
  text "5VO" at 38,13.924 h2
  text "DGND" at 38,11.384 h2
  text "5V" at 17.84,11.1 h2 r90
  text "UGND" at 20.386,11.1 h2 r90
  text "DGND" at 28.006,11.1 h2 r90
  text "9V" at 33.085,11.1 h2 r90
  text "9V" at 38,8.845 h2
  text "HOST" at 0.633,8.8 h2.5 r270